# Altium PCB GeekTrack_PCB.pcbdoc
Units mil, origin at the board's own origin, x right, y up, seen from the top; angles counter-clockwise.
Board outline 3959.43 x 2614.84 mil, 4 copper layers (Top Layer, Mid-Layer 1, Mid-Layer 2, Bottom Layer); 61 components, 43 nets, 274 pads, 178 vias.
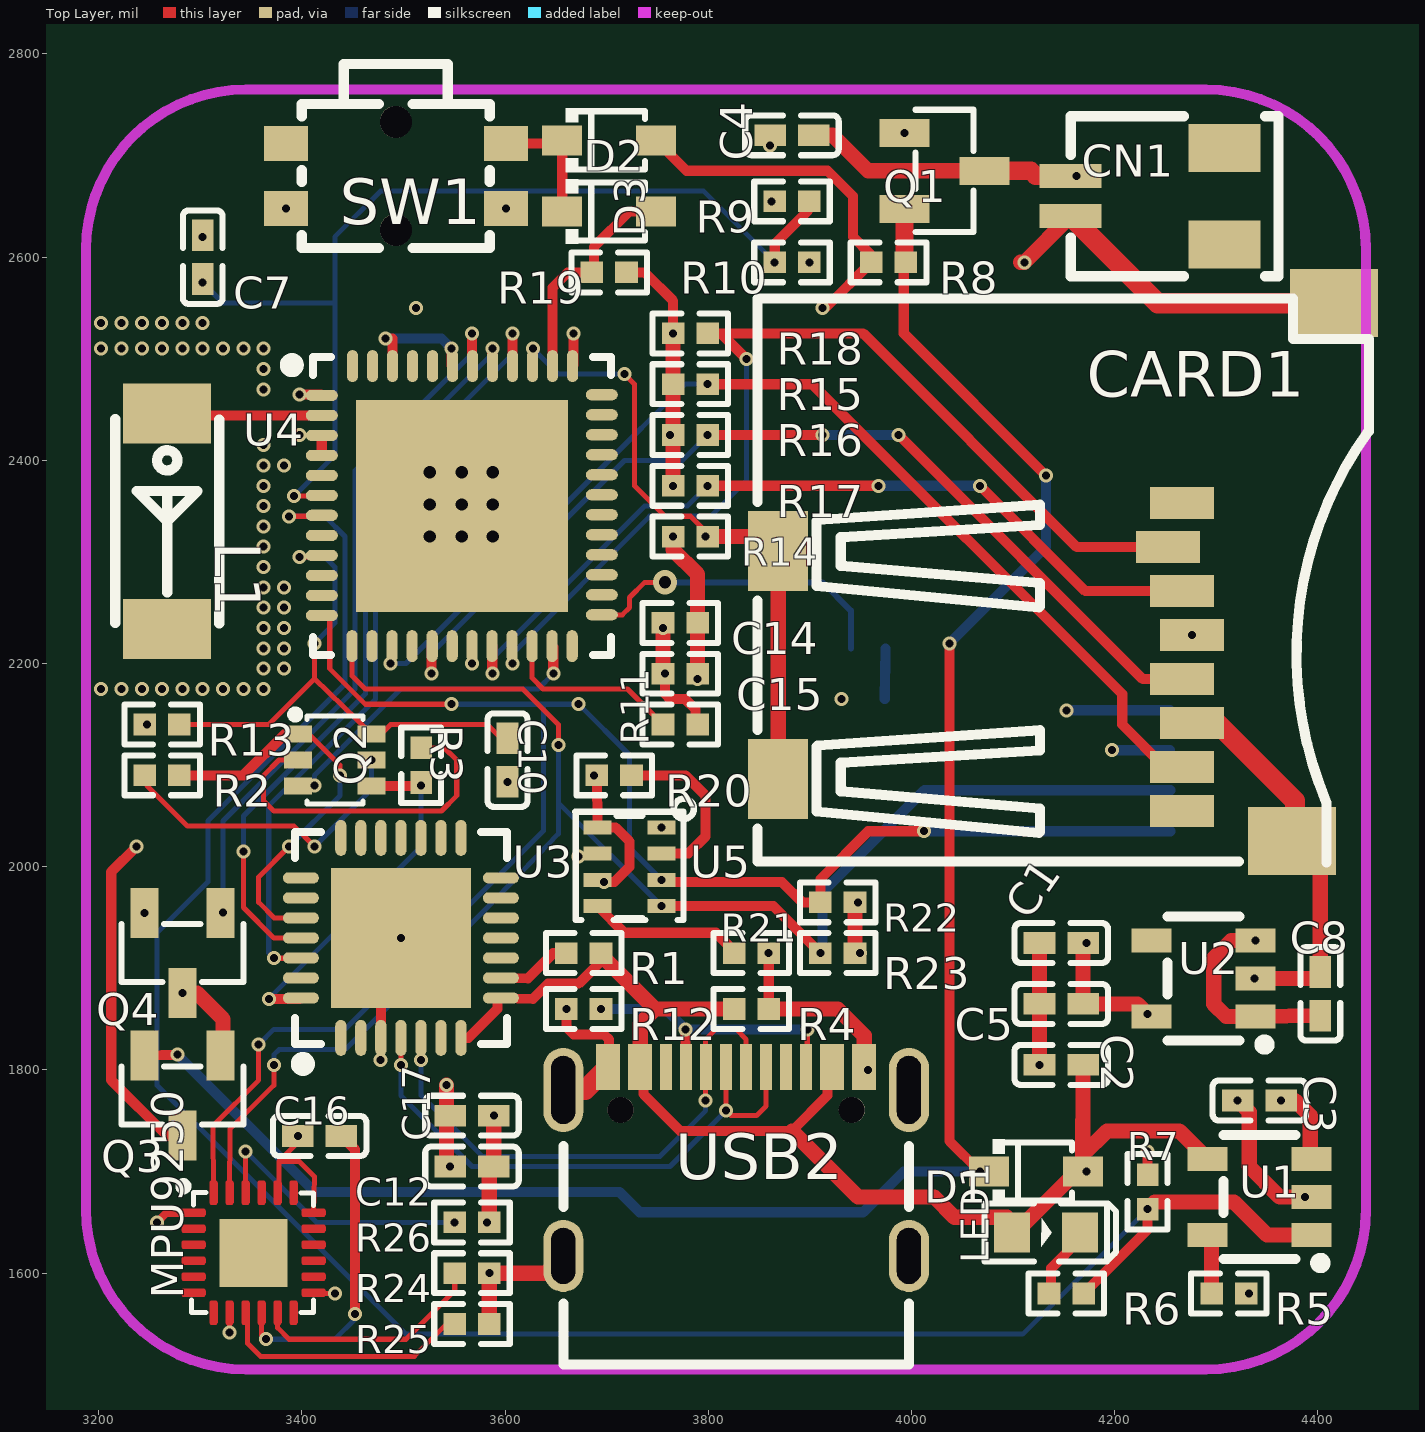
[diagram p0: Top Layer view]
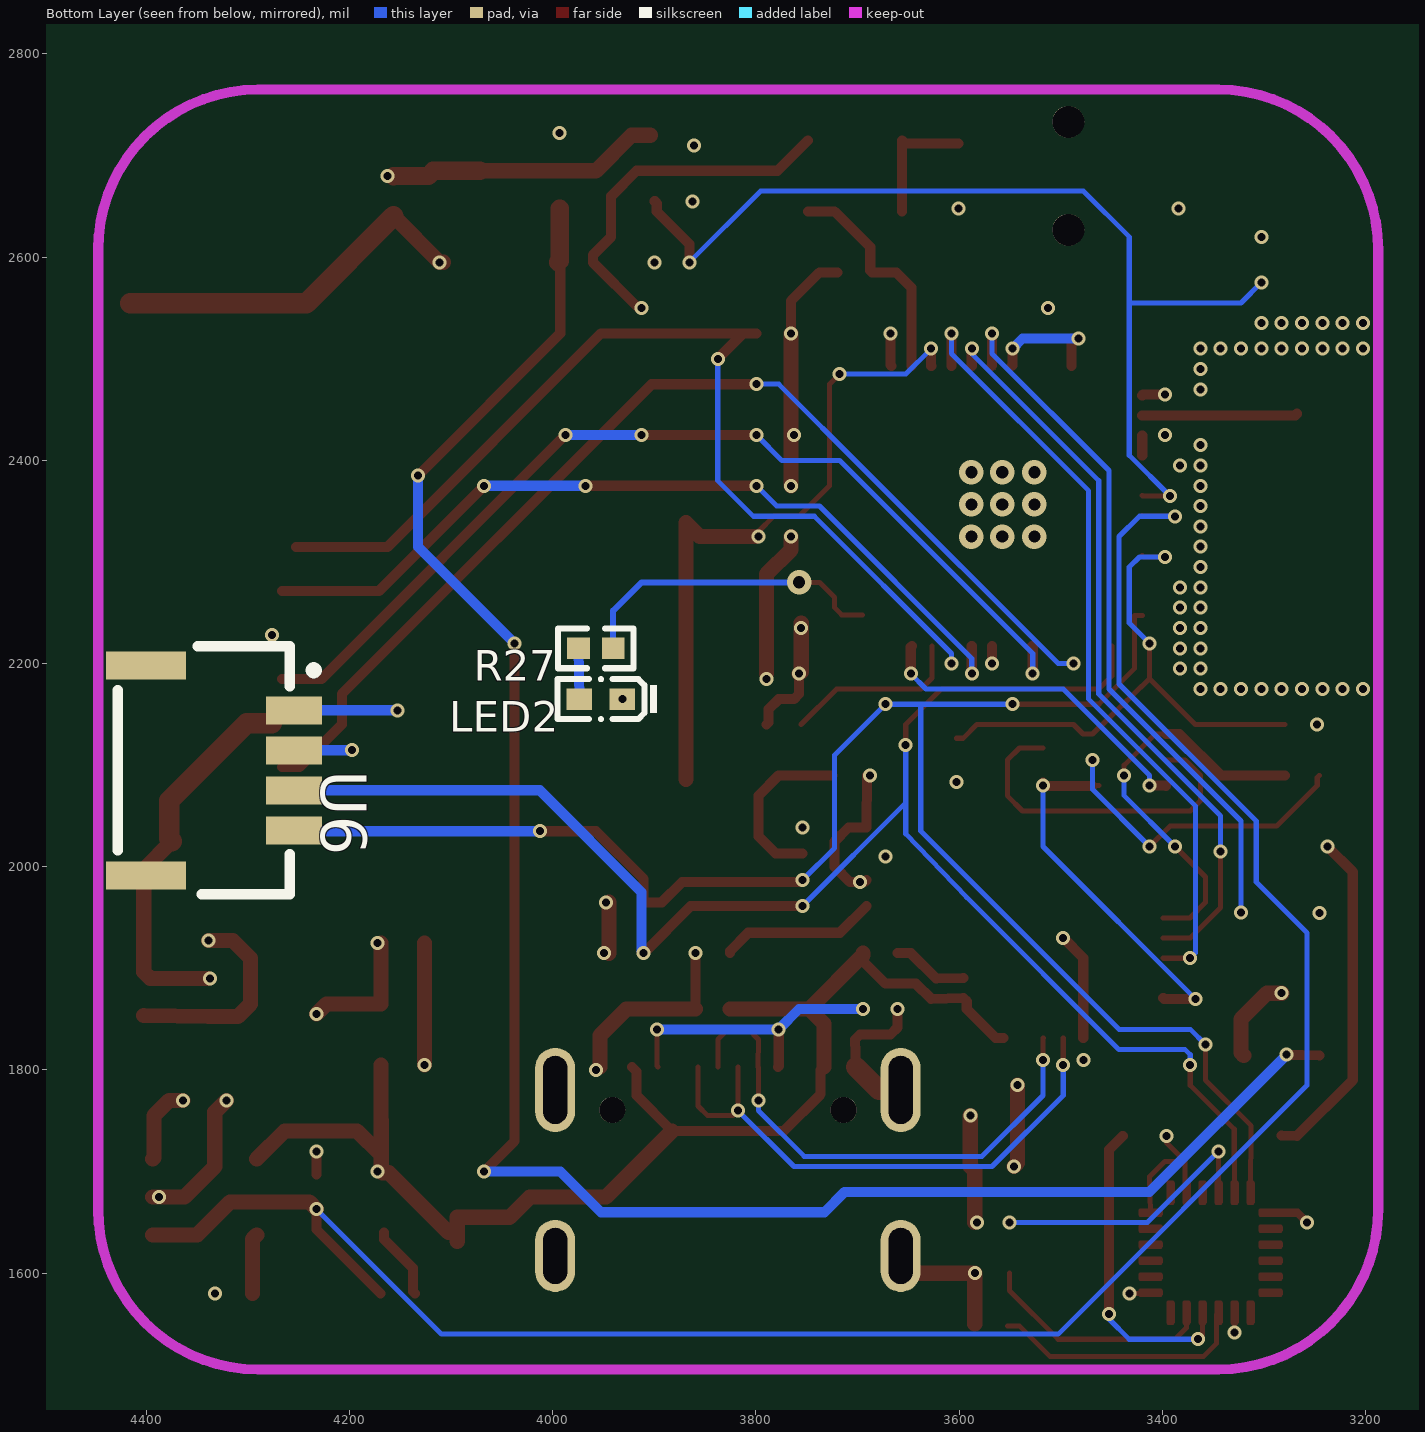
[diagram p1: Bottom Layer view, seen from below]
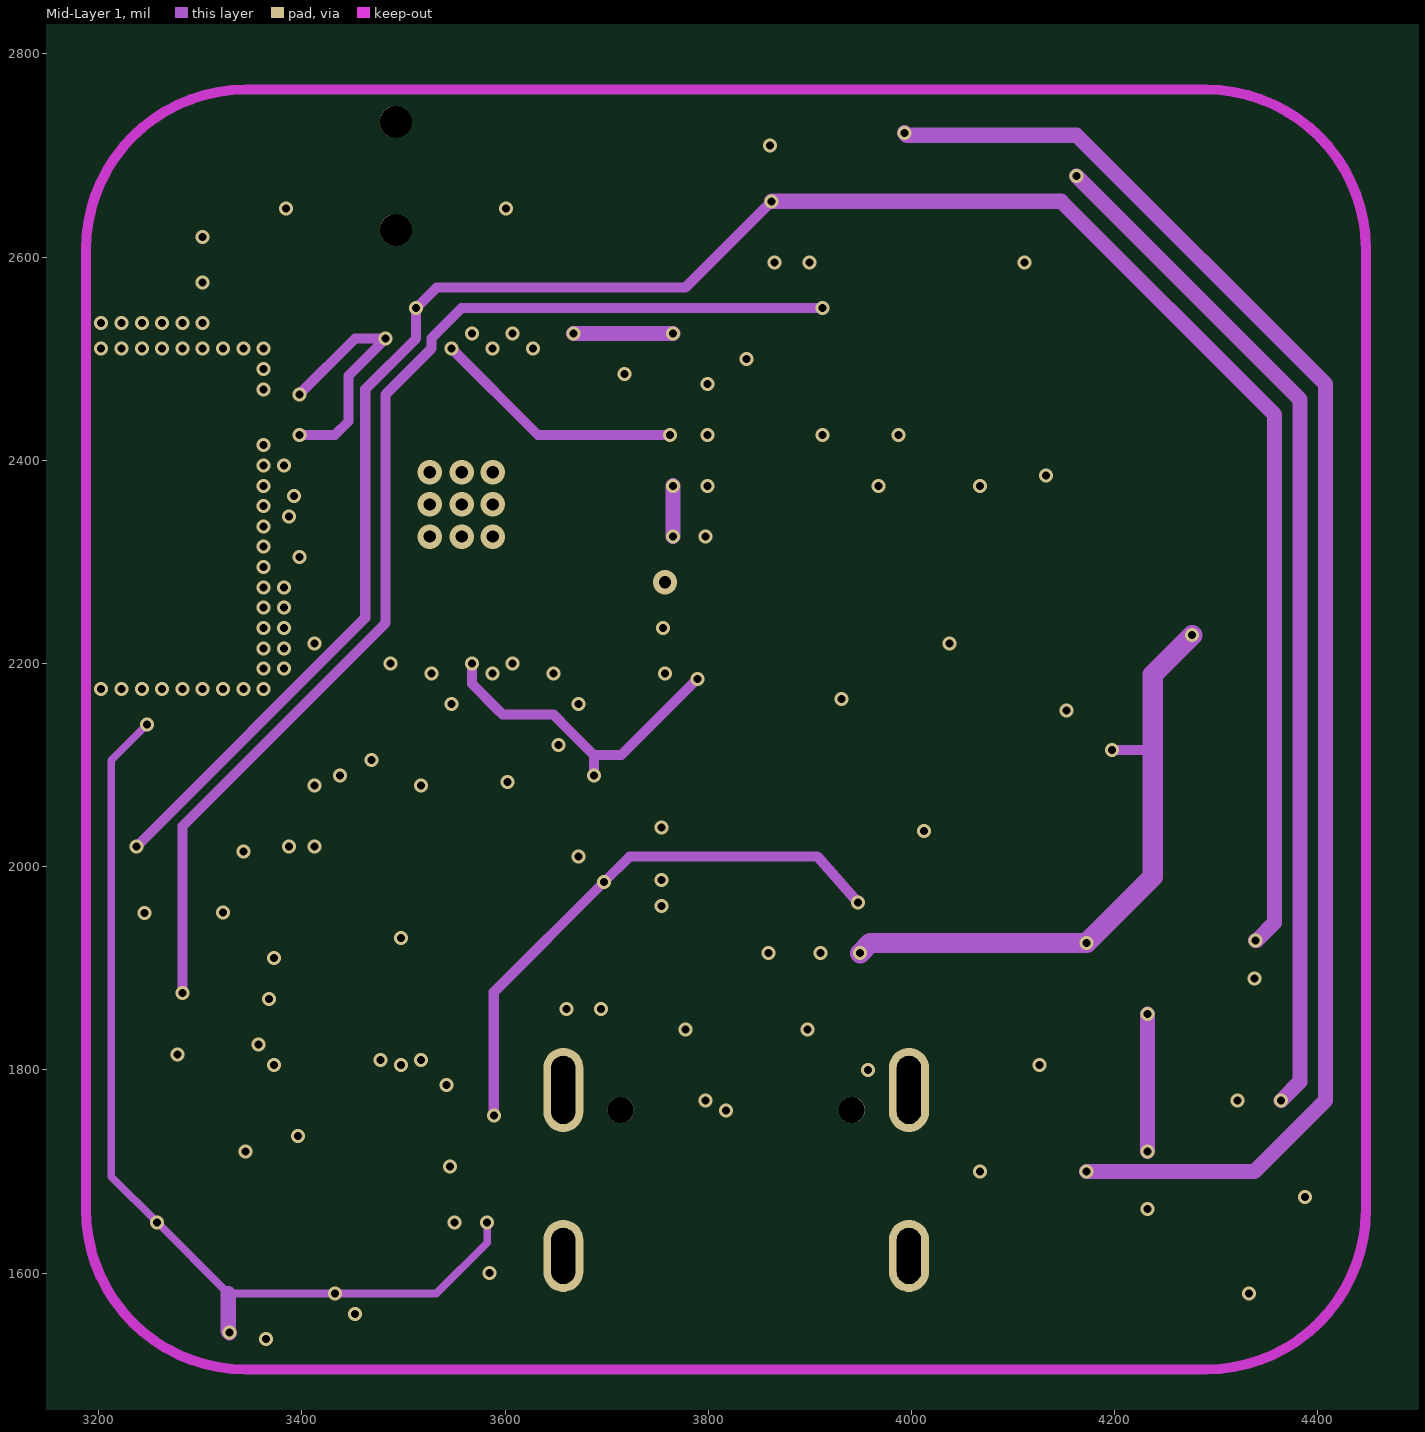
[diagram p2: Mid-Layer 1]
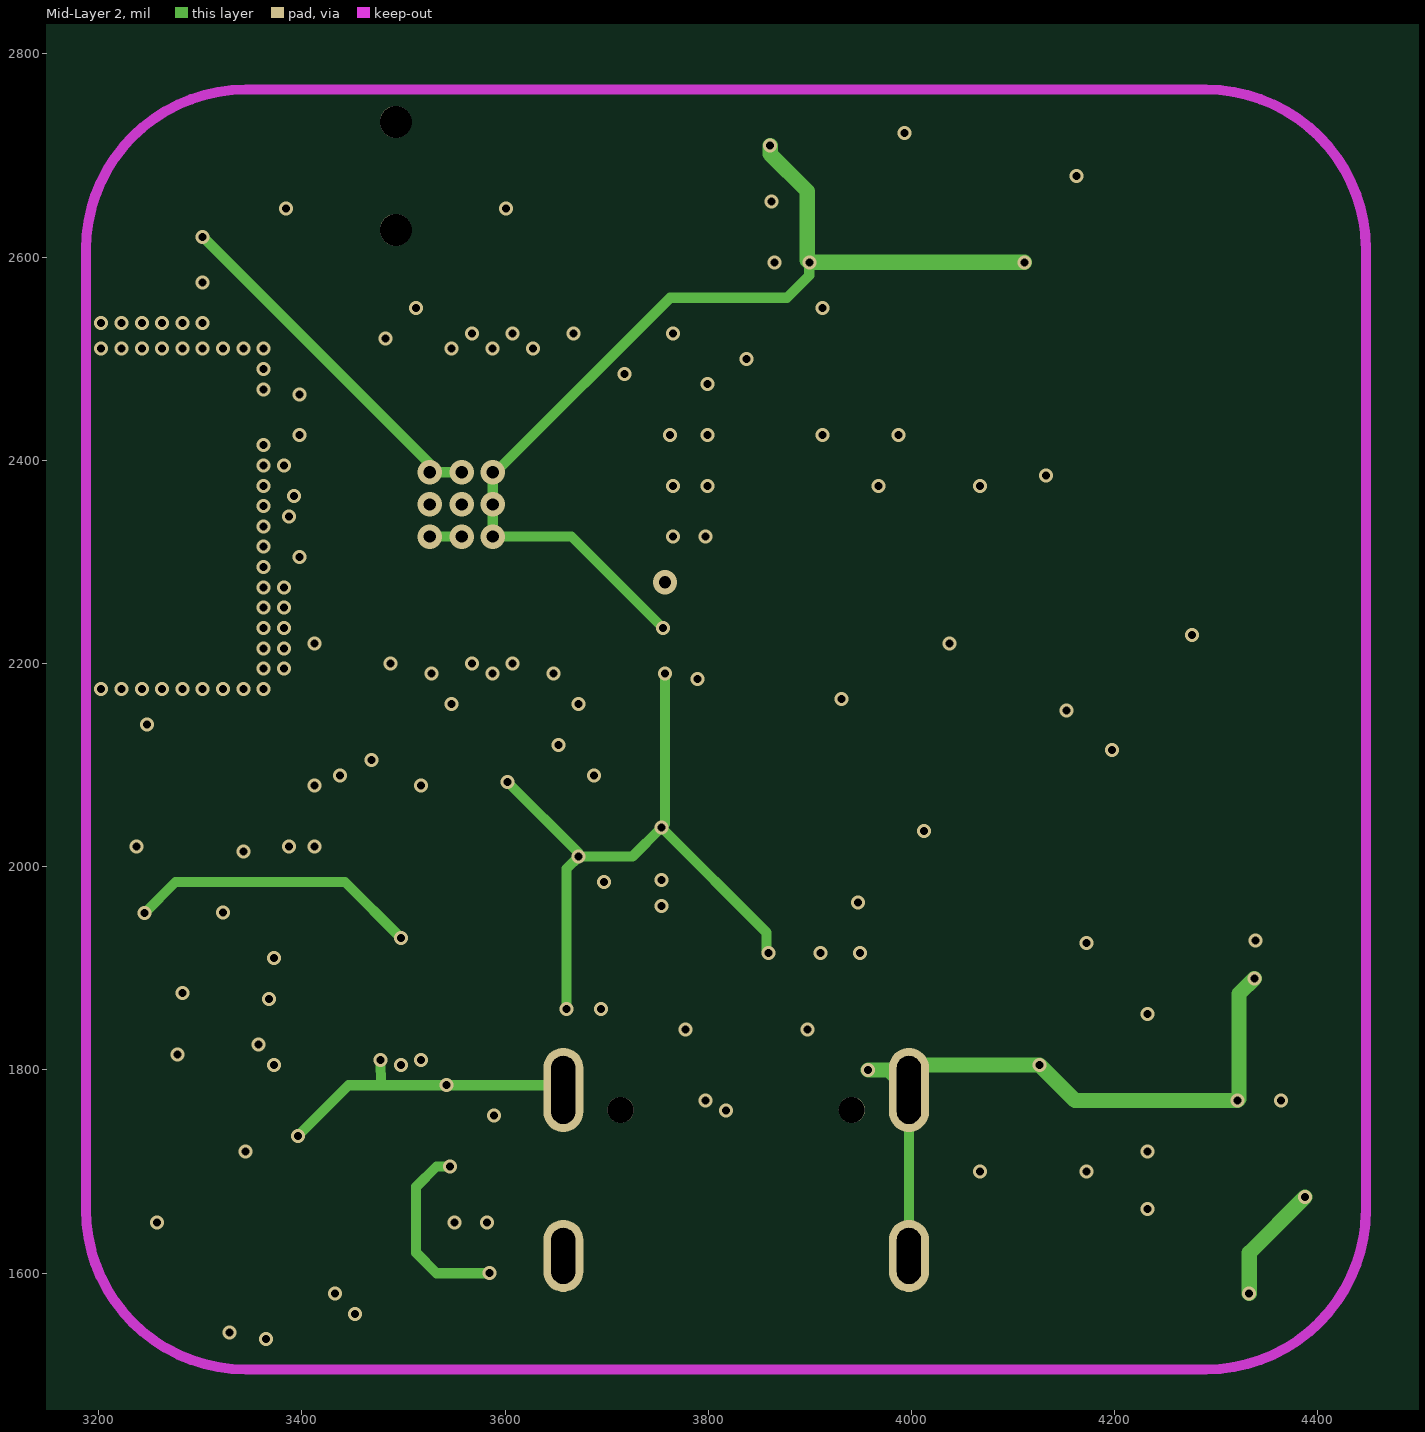
[diagram p3: Mid-Layer 2]

## Layer stack, top to bottom
Top Solder: solder mask 0.4, Solder Resist, Dk 3.5
Top Layer: signal copper 1.4
Dielectric1: dielectric 12.6, FR-4, Dk 4.8
Mid-Layer 1: signal copper 1.4
Dielectric3: dielectric 12.6, FR-4, Dk 4.8
Mid-Layer 2: signal copper 1.4
Dielectric2: dielectric 12.6, FR-4, Dk 4.8
Bottom Layer: signal copper 1.4
Bottom Solder: solder mask 0.4, Solder Resist, Dk 3.5

## Board outline
4959.43,1000 1000,1000 1000,3614.84 4959.43,3614.84

## Design rules (kind name [scope] priority, off if disabled: settings)
Clearance [All] p1: gap=10 ignorepadtopadclearanceinfootprint=FALSE except(0: Arc-Hole Track-Hole SMDPad-Hole THPad-Hole Via-Hole Fill-Hole Poly-Hole Region-Hole Text-Hole)
PolygonConnect [All] p1: connectstyle=Relief reliefconductorwidth=10 reliefentries=4 polygonreliefangle="90 Angle" airgapwidth=10
RoutingVias [All] p1: holewidth=28 width=50 viastyle="Through Hole" minholewidth=28 minwidth=50 maxholewidth=28 maxwidth=50
SolderMaskExpansion [All] p1: expansion=4
Width [All] p1: maxlimit=10 minlimit=10 preferedwidth=10
30 further rules are at their usual default settings.

## Components (designator, comment, footprint, x,y, rotation, side; value= is the part's Value field where it differs from the comment)
C1 "100nF" C0402 4147.5,1924.84 r0 top
C2 "10uF" C0402 4147.5,1804.84 r0 top
C3 "100nF" C0402 4342.5,1769.84 r0 top
C4 "10uF" C0402 3882.5,2719.84 r0 top
C5 "10uF" C0402 4147.5,1864.84 r0 top
C7 "100nF" C0402 3302.5,2599.84 r90 top
C8 "1uF" C0402 4402.5,1874.84 r270 top
C10 "100nF" C0402 3602.5,2104.84 r90 top
C12 "104" C0402 3567.5,1704.84 r0 top
C14 "1u" R0402#1 3772.5,2239.84 r0 top
C15 "0.1u" R0402#1 3772.5,2189.84 r0 top
C16 "104" C0402 3417.5,1734.84 r0 top
C17 "103" C0402 3567.5,1754.84 r0 top
CARD1 "TF-001B" TF-SMD_TF-001B 4142.5,2289.84 r180 top
CN1 "A1002WR-S-2P" CONN-SMD_A1002WR-S-2P 4232.5,2659.84 r90 top
D1 "B5819WS_C122855" SOD-323_L1.8-W1.3-LS2.5-RD 4122.5,1699.84 r0 top
D2 "B5819WS_C122855" SOD-323_L1.8-W1.3-LS2.5-RD 3702.5,2714.84 r0 top
D3 "B5819WS_C122855" SOD-323_L1.8-W1.3-LS2.5-RD 3702.5,2644.84 r0 top
L1 "AN2051-245" ANT2051 3267.5,2339.84 r270 top
LED1 "LED-0603_R" LED0603_RED 4132.5,1639.84 r0 top
LED2 "LED-0402" LED0402-RD 3952.5,2164.84 r180 bottom
MPU9250 "MPU9250" MPU9250 3352.45,1619.87 r0 top
Q1 "AO3401A_C700954" SOT-23-3_L2.9-W1.3-P1.90-LS2.4-BR 4032.5,2684.84 r180 top
Q2 "LMBT3904DW1T1G" SOT-363_L2.0-W1.3-P0.65-LS2.1-TL 3432.5,2104.84 r0 top
Q3 "AO3401A_C700954" SOT-23-3_L2.9-W1.3-P1.90-LS2.4-BR 3282.5,1774.84 r90 top
Q4 "AO3400A_C700953" SOT-23-3_L2.9-W1.3-P1.90-LS2.4-BR 3282.5,1914.84 r90 top
R1 "10K" R0402#1 3677.5,1914.84 r180 top
R2 "12K" R0402#1 3262.5,2089.84 r0 top
R3 "12K" R0402#1 3517.5,2099.84 r90 top
R4 "100K" R0402#1 3842.5,1859.84 r180 top
R5 "2K" R0402#1 4312.5,1579.84 r0 top
R6 "5.1K" R0402#1 4152.5,1579.84 r0 top
R7 "10K" R0402#1 4232.5,1679.84 r90 top
R8 "100K" R0402#1 3977.5,2594.84 r180 top
R9 "100K" R0402#1 3882.5,2654.84 r0 top
R10 "100K" R0402#1 3882.5,2594.84 r0 top
R11 "5K" R0402#1 3772.5,2139.84 r180 top
R12 "1K" R0402#1 3677.5,1859.84 r180 top
R13 "10K" R0402#1 3262.5,2139.84 r180 top
R14 "10K" R0402#1 3782.5,2324.84 r0 top
R15 "10K" R0402#1 3782.5,2474.84 r0 top
R16 "10K" R0402#1 3782.5,2424.84 r0 top
R17 "10K" R0402#1 3782.5,2374.84 r0 top
R18 "10K" R0402#1 3782.5,2524.84 r0 top
R19 "10K" R0402#1 3702.5,2584.84 r0 top
R20 "10k" R0402#1 3707.5,2089.84 r180 top
R21 "10k" R0402#1 3842.5,1914.84 r180 top
R22 "10k" R0402#1 3927.5,1964.84 r0 top
R23 "10k" R0402#1 3927.5,1914.84 r0 top
R24 "10k" R0402#1 3567.5,1599.84 r0 top
R25 "10k" R0402#1 3567.5,1549.84 r180 top
R26 "10k" R0402#1 3567.5,1649.84 r0 top
R27 "5K" R0402#2 3957.5,2214.84 r180 bottom
SW1 "ST-1189E" SW-SMD_ST-1189E 3492.5,2679.84 r90 top
U1 "MCP73831" SOT-23-5_L3.0-W1.7-P0.95-LS2.8-BR 4342.5,1674.84 r0 top
U2 "LP5907QMFX-3.3Q1" SOT-23-5_L3.0-W1.7-P0.95-LS2.8-BR 4287.5,1889.84 r0 top
U3 "CP2102-GMR" QFN-28_L5.0-W5.0-P0.50-BL-EP 3497.5,1929.84 r0 top
U4 "ESP32-PICO-D4" QFN-48_7X7X05P 3557.5,2354.84 r0 top
U5 "BMP280" SENSOR-TH_BMP280-BL 3722.5,1999.84 r180 top
U6 "SH1.0X4" CONN-SMD_SH1.0X4 4327.5,2094.84 r90 bottom
USB2 "TYPE-C 16P(073)" USB-C-SMD_TYPE-C16PIN_C668624 3827.5,1709.84 r0 top

## Footprints (in the part's own frame and the unit in brackets; to place one, negate y for a bottom-side part, rotate by r counter-clockwise, add the part's x,y. Pads: shape width x height; smd on the part's side, far side on the other; paste and mask are expansions set on the pad)
ANT2051 [mm]
  rect 1.5x2.2 smd: 1(-2.69,0) 2(2.69,0)
  silkscreen extent -2.56,-1.3 2.55,1.3
C0402 [mm]
  rect 0.79x0.54 smd: 1(-0.545,0) 2(0.545,0)
  silkscreen extent -1.17,-0.5 1.17,0.5
CONN-SMD_A1002WR-S-2P [mm]
  rect 0.6x1.55 smd: 1(-0.498,1.924) 2(0.501,1.924)
  rect 1.2x1.8 smd: 3(1.201,-1.924) 4(-1.201,-1.924)
  silkscreen extent -2,-3.27 2,1.92
CONN-SMD_SH1.0X4 [mm]
  rect 0.7x1.4 smd: 1(1.5,-1.85) 2(0.5,-1.85) 3(-0.5,-1.85) 4(-1.5,-1.85)
  rect 0.7x2 smd: 5(2.625,1.85) 6(-2.625,1.85)
  silkscreen extent -3.1,-2.42 3.1,2.55
LED0402-RD [mm]
  rect 0.636x0.54 smd: 1(0.538,0) 2(-0.538,0)
  silkscreen extent -1.09,-0.54 1.39,0.54
LED0603_RED [mm]
  rect 0.9x1 smd: 1(-0.85,0) 2(0.85,0)
  silkscreen extent -1.54,-0.73 1.75,0.73
MPU9250 [mil]
  round 0 smd: 1(-59,39.5) 2(-59,23.75) 3(-59,8) 4(-59,-7.74) 5(-59,-23.49) 6(-59,-39.24) 7(-39.31,-58.93) 8(-23.57,-58.93) 9(-7.82,-58.93) 10(7.93,-58.93) 11(23.68,-58.93) 12(39.43,-58.93) 13(59.11,-39.24) 14(59.11,-23.49) 15(59.11,-7.74) 16(59.11,8) 17(59.11,23.75) 18(59.11,39.5) 19(39.43,59.18) 20(23.68,59.18) 21(7.93,59.18) 22(-7.82,59.18) 23(-23.57,59.18) 24(-39.31,59.18)
  rect 66.93x66.93 smd: 25(0,0)
  Top Layer region: -68.84,35.56 -69.6,35.71 -70.23,36.14 -70.66,36.78 -70.81,37.53 -70.81,41.47 -70.66,42.22 -70.23,42.86 -69.6,43.29 -68.84,43.44 -49.16,43.44 -48.4,43.29 -47.77,42.86 -47.34,42.22 -47.19,41.47 -47.19,37.53 -47.34,36.78 -47.77,36.14 -48.4,35.71 -49.16,35.56
  Top Layer region: -68.84,19.82 -69.6,19.96 -70.23,20.39 -70.66,21.03 -70.81,21.78 -70.81,25.72 -70.66,26.47 -70.23,27.11 -69.6,27.54 -68.84,27.69 -49.16,27.69 -48.4,27.54 -47.77,27.11 -47.34,26.47 -47.19,25.72 -47.19,21.78 -47.34,21.03 -47.77,20.39 -48.4,19.96 -49.16,19.82
  Top Layer region: -68.84,4.07 -69.6,4.22 -70.23,4.64 -70.66,5.28 -70.81,6.04 -70.81,9.97 -70.66,10.73 -70.23,11.36 -69.6,11.79 -68.84,11.94 -49.16,11.94 -48.4,11.79 -47.77,11.36 -47.34,10.73 -47.19,9.97 -47.19,6.04 -47.34,5.28 -47.77,4.64 -48.4,4.22 -49.16,4.07
  Top Layer region: -68.84,-11.68 -69.6,-11.53 -70.23,-11.11 -70.66,-10.47 -70.81,-9.71 -70.81,-5.78 -70.66,-5.02 -70.23,-4.38 -69.6,-3.96 -68.84,-3.81 -49.16,-3.81 -48.4,-3.96 -47.77,-4.38 -47.34,-5.02 -47.19,-5.78 -47.19,-9.71 -47.34,-10.47 -47.77,-11.11 -48.4,-11.53 -49.16,-11.68
  Top Layer region: -68.84,-27.43 -69.6,-27.28 -70.23,-26.85 -70.66,-26.21 -70.81,-25.46 -70.81,-21.52 -70.66,-20.77 -70.23,-20.13 -69.6,-19.7 -68.84,-19.56 -49.16,-19.56 -48.4,-19.7 -47.77,-20.13 -47.34,-20.77 -47.19,-21.52 -47.19,-25.46 -47.34,-26.21 -47.77,-26.85 -48.4,-27.28 -49.16,-27.43
  Top Layer region: -68.84,-43.18 -69.6,-43.03 -70.23,-42.6 -70.66,-41.96 -70.81,-41.21 -70.81,-37.27 -70.66,-36.52 -70.23,-35.88 -69.6,-35.45 -68.84,-35.3 -49.16,-35.3 -48.4,-35.45 -47.77,-35.88 -47.34,-36.52 -47.19,-37.27 -47.19,-41.21 -47.34,-41.96 -47.77,-42.6 -48.4,-43.03 -49.16,-43.18
  Top Layer region: -43.25,-49.08 -43.1,-48.33 -42.67,-47.69 -42.04,-47.26 -41.28,-47.11 -37.35,-47.11 -36.59,-47.26 -35.95,-47.69 -35.53,-48.33 -35.38,-49.08 -35.38,-68.77 -35.53,-69.52 -35.95,-70.16 -36.59,-70.59 -37.35,-70.74 -41.28,-70.74 -42.04,-70.59 -42.67,-70.16 -43.1,-69.52 -43.25,-68.77
  Top Layer region: -27.5,-49.08 -27.35,-48.33 -26.93,-47.69 -26.29,-47.26 -25.53,-47.11 -21.6,-47.11 -20.84,-47.26 -20.21,-47.69 -19.78,-48.33 -19.63,-49.08 -19.63,-68.77 -19.78,-69.52 -20.21,-70.16 -20.84,-70.59 -21.6,-70.74 -25.53,-70.74 -26.29,-70.59 -26.93,-70.16 -27.35,-69.52 -27.5,-68.77
  Top Layer region: -11.76,-49.08 -11.61,-48.33 -11.18,-47.69 -10.54,-47.26 -9.79,-47.11 -5.85,-47.11 -5.1,-47.26 -4.46,-47.69 -4.03,-48.33 -3.88,-49.08 -3.88,-68.77 -4.03,-69.52 -4.46,-70.16 -5.1,-70.59 -5.85,-70.74 -9.79,-70.74 -10.54,-70.59 -11.18,-70.16 -11.61,-69.52 -11.76,-68.77
  Top Layer region: 3.99,-49.08 4.14,-48.33 4.57,-47.69 5.21,-47.26 5.96,-47.11 9.9,-47.11 10.65,-47.26 11.29,-47.69 11.72,-48.33 11.87,-49.08 11.87,-68.77 11.72,-69.52 11.29,-70.16 10.65,-70.59 9.9,-70.74 5.96,-70.74 5.21,-70.59 4.57,-70.16 4.14,-69.52 3.99,-68.77
  Top Layer region: 19.74,-49.08 19.89,-48.33 20.32,-47.69 20.95,-47.26 21.71,-47.11 25.65,-47.11 26.4,-47.26 27.04,-47.69 27.46,-48.33 27.61,-49.08 27.61,-68.77 27.46,-69.52 27.04,-70.16 26.4,-70.59 25.65,-70.74 21.71,-70.74 20.95,-70.59 20.32,-70.16 19.89,-69.52 19.74,-68.77
  Top Layer region: 35.49,-49.08 35.64,-48.33 36.07,-47.69 36.7,-47.26 37.46,-47.11 41.39,-47.11 42.15,-47.26 42.79,-47.69 43.21,-48.33 43.36,-49.08 43.36,-68.77 43.21,-69.52 42.79,-70.16 42.15,-70.59 41.39,-70.74 37.46,-70.74 36.7,-70.59 36.07,-70.16 35.64,-69.52 35.49,-68.77
  Top Layer region: 49.27,-43.18 48.51,-43.03 47.88,-42.6 47.45,-41.96 47.3,-41.21 47.3,-37.27 47.45,-36.52 47.88,-35.88 48.51,-35.45 49.27,-35.3 68.95,-35.3 69.71,-35.45 70.35,-35.88 70.77,-36.52 70.92,-37.27 70.92,-41.21 70.77,-41.96 70.35,-42.6 69.71,-43.03 68.95,-43.18
  Top Layer region: 49.27,-27.43 48.51,-27.28 47.88,-26.85 47.45,-26.21 47.3,-25.46 47.3,-21.52 47.45,-20.77 47.88,-20.13 48.51,-19.7 49.27,-19.56 68.95,-19.56 69.71,-19.7 70.35,-20.13 70.77,-20.77 70.92,-21.52 70.92,-25.46 70.77,-26.21 70.35,-26.85 69.71,-27.28 68.95,-27.43
  Top Layer region: 49.27,-11.68 48.51,-11.53 47.88,-11.11 47.45,-10.47 47.3,-9.71 47.3,-5.78 47.45,-5.02 47.88,-4.38 48.51,-3.96 49.27,-3.81 68.95,-3.81 69.71,-3.96 70.35,-4.38 70.77,-5.02 70.92,-5.78 70.92,-9.71 70.77,-10.47 70.35,-11.11 69.71,-11.53 68.95,-11.68
  Top Layer region: 49.27,4.07 48.51,4.22 47.88,4.64 47.45,5.28 47.3,6.04 47.3,9.97 47.45,10.73 47.88,11.36 48.51,11.79 49.27,11.94 68.95,11.94 69.71,11.79 70.35,11.36 70.77,10.73 70.92,9.97 70.92,6.04 70.77,5.28 70.35,4.64 69.71,4.22 68.95,4.07
  Top Layer region: 49.27,19.82 48.51,19.96 47.88,20.39 47.45,21.03 47.3,21.78 47.3,25.72 47.45,26.47 47.88,27.11 48.51,27.54 49.27,27.69 68.95,27.69 69.71,27.54 70.35,27.11 70.77,26.47 70.92,25.72 70.92,21.78 70.77,21.03 70.35,20.39 69.71,19.96 68.95,19.82
  Top Layer region: 49.27,35.56 48.51,35.71 47.88,36.14 47.45,36.78 47.3,37.53 47.3,41.47 47.45,42.22 47.88,42.86 48.51,43.29 49.27,43.44 68.95,43.44 69.71,43.29 70.35,42.86 70.77,42.22 70.92,41.47 70.92,37.53 70.77,36.78 70.35,36.14 69.71,35.71 68.95,35.56
  Top Layer region: 35.49,69.03 35.64,69.78 36.07,70.42 36.7,70.85 37.46,71 41.39,71 42.15,70.85 42.79,70.42 43.21,69.78 43.36,69.03 43.36,49.34 43.21,48.59 42.79,47.95 42.15,47.52 41.39,47.37 37.46,47.37 36.7,47.52 36.07,47.95 35.64,48.59 35.49,49.34
  Top Layer region: 19.74,69.03 19.89,69.78 20.32,70.42 20.95,70.85 21.71,71 25.65,71 26.4,70.85 27.04,70.42 27.46,69.78 27.61,69.03 27.61,49.34 27.46,48.59 27.04,47.95 26.4,47.52 25.65,47.37 21.71,47.37 20.95,47.52 20.32,47.95 19.89,48.59 19.74,49.34
  Top Layer region: 3.99,69.03 4.14,69.78 4.57,70.42 5.21,70.85 5.96,71 9.9,71 10.65,70.85 11.29,70.42 11.72,69.78 11.87,69.03 11.87,49.34 11.72,48.59 11.29,47.95 10.65,47.52 9.9,47.37 5.96,47.37 5.21,47.52 4.57,47.95 4.14,48.59 3.99,49.34
  Top Layer region: -11.76,69.03 -11.61,69.78 -11.18,70.42 -10.54,70.85 -9.79,71 -5.85,71 -5.1,70.85 -4.46,70.42 -4.03,69.78 -3.88,69.03 -3.88,49.34 -4.03,48.59 -4.46,47.95 -5.1,47.52 -5.85,47.37 -9.79,47.37 -10.54,47.52 -11.18,47.95 -11.61,48.59 -11.76,49.34
  Top Layer region: -27.5,69.03 -27.35,69.78 -26.93,70.42 -26.29,70.85 -25.53,71 -21.6,71 -20.84,70.85 -20.21,70.42 -19.78,69.78 -19.63,69.03 -19.63,49.34 -19.78,48.59 -20.21,47.95 -20.84,47.52 -21.6,47.37 -25.53,47.37 -26.29,47.52 -26.93,47.95 -27.35,48.59 -27.5,49.34
  Top Layer region: -43.25,69.03 -43.1,69.78 -42.67,70.42 -42.04,70.85 -41.28,71 -37.35,71 -36.59,70.85 -35.95,70.42 -35.53,69.78 -35.38,69.03 -35.38,49.34 -35.53,48.59 -35.95,47.95 -36.59,47.52 -37.35,47.37 -41.28,47.37 -42.04,47.52 -42.67,47.95 -43.1,48.59 -43.25,49.34
  silkscreen extent -73,-59 59,70
QFN-28_L5.0-W5.0-P0.50-BL-EP [mm]
  oval 0.28x0.9 smd: 1(-1.501,-2.5) 2(-1.001,-2.5) 3(-0.501,-2.5) 4(0,-2.5) 5(0.5,-2.5) 6(1.001,-2.5) 7(1.501,-2.5) 15(1.501,2.5) 16(1.001,2.5) 17(0.5,2.5) 18(0,2.5) 19(-0.501,2.5) 20(-1.001,2.5) 21(-1.501,2.5)
  oval 0.9x0.28 smd: 8(2.5,-1.501) 9(2.5,-1.001) 10(2.5,-0.5) 11(2.5,0) 12(2.5,0.5) 13(2.5,1.001) 14(2.5,1.501) 22(-2.5,1.501) 23(-2.5,1.001) 24(-2.5,0.5) 25(-2.5,0) 26(-2.5,-0.5) 27(-2.5,-1.001) 28(-2.5,-1.501)
  rect 3.5x3.5 smd: 29(0,0)
  silkscreen extent -2.65,-3.3 2.65,2.65
QFN-48_7X7X05P [mm]
  oval 0.8x0.28 smd: 1(-3.5,2.769) 2(-3.5,2.268) 3(-3.5,1.768) 4(-3.5,1.267) 5(-3.5,0.767) 6(-3.5,0.267) 7(-3.5,-0.231) 8(-3.5,-0.732) 9(-3.5,-1.232) 10(-3.5,-1.732) 11(-3.5,-2.233) 12(-3.5,-2.733) 25(3.5,-2.718) 26(3.5,-2.217) 27(3.5,-1.717) 28(3.5,-1.217) 29(3.5,-0.716) 30(3.5,-0.216) 31(3.5,0.282) 32(3.5,0.782) 33(3.5,1.283) 34(3.5,1.783) 35(3.5,2.283) 36(3.5,2.784)
  oval 0.28x0.8 smd: 13(-2.743,-3.5) 14(-2.243,-3.5) 15(-1.742,-3.5) 16(-1.242,-3.5) 17(-0.742,-3.5) 18(-0.241,-3.5) 19(0.257,-3.5) 20(0.757,-3.5) 21(1.257,-3.5) 22(1.758,-3.5) 23(2.258,-3.5) 24(2.758,-3.5) 37(2.769,3.5) 38(2.268,3.5) 39(1.768,3.5) 40(1.267,3.5) 41(0.767,3.5) 42(0.267,3.5) 43(-0.231,3.5) 44(-0.732,3.5) 45(-1.232,3.5) 46(-1.732,3.5) 47(-2.233,3.5) 48(-2.733,3.5)
  rect 5.3x5.3 smd: 49(0,0)
  silkscreen extent -4.4,-3.72 3.72,3.72
R0402#1 [mm]
  rect 0.566x0.54 smd: 1(-0.433,0) 2(0.433,0)
  silkscreen extent -0.94,-0.5 0.94,0.5
R0402#2 [mm]
  rect 0.566x0.54 smd: 1(0.433,0) 2(-0.433,0)
  silkscreen extent -0.94,-0.5 0.94,0.5
SENSOR-TH_BMP280-BL [mil]
  rect 27.56x13.8 smd: 1(-31.5,-38.6) 2(-31.5,-13) 3(-31.5,13) 4(-31.5,38.6) 5(31.5,38.6) 6(31.5,13) 7(31.5,-13) 8(31.5,-38.6)
  silkscreen extent -63,-67 54,52
SOD-323_L1.8-W1.3-LS2.5-RD [mm]
  rect 1x0.75 smd: 1(-1.173,0) 2(1.173,0)
  silkscreen extent -1.08,-0.8 0.9,0.8
SOT-23-3_L2.9-W1.3-P1.90-LS2.4-BR [mm]
  rect 1.25x0.7 smd: 1(1,-0.95) 2(1,0.95) 3(-1,0)
  silkscreen extent -0.73,-1.53 0.73,1.53
SOT-23-5_L3.0-W1.7-P0.95-LS2.8-BR [mm]
  rect 1x0.6 smd: 1(1.3,-0.95) 2(1.3,0) 3(1.3,0.95) 4(-1.3,0.95) 5(-1.3,-0.95)
  silkscreen extent -0.9,-1.78 1.65,1.55
SOT-363_L2.0-W1.3-P0.65-LS2.1-TL [mm]
  rect 0.7x0.42 smd: 1(-0.92,0.65) 2(-0.92,0) 3(-0.92,-0.65) 4(0.92,-0.65) 5(0.92,0) 6(0.92,0.65)
  silkscreen extent -1.09,-1.1 0.7,1.24
SW-SMD_ST-1189E [mm]
  rect 0.875x1.1 smd: 1(0.813,2.75) 2(0.813,-2.75) 3(-0.813,2.75) 4(-0.813,-2.75)
  round 0.8 hole 0.8 unplated: ""(-1.35,0) ""(1.35,0)
  silkscreen extent -1.8,-2.35 2.8,2.35
TF-SMD_TF-001B [mm]
  rect 1.6x0.8 smd: 1(-3.145,-1.726) 2(-2.8,-0.625) 3(-3.15,0.475) 4(-3.4,1.575) 5(-3.15,2.675) 6(-3.4,3.775) 7(-3.15,4.875) 8(-3.15,5.975)
  rect 2.2x1.7 smd: 9(-5.9,6.725) 10(-6.95,-6.725)
  rect 1.5x2 smd: 11(6.95,5.175) 12(6.95,-0.525)
  silkscreen extent -7.82,-6.84 7.47,7.26
USB-C-SMD_TYPE-C16PIN_C668624 [mm]
  oval 1x2.1 hole 0.6 slot 1.7 at 90 deg: 1(-4.32,1.787) 2(4.32,1.787)
  oval 1x1.8 hole 0.6 slot 1.4 at 90 deg: 3(-4.32,-2.362) 4(4.32,-2.362)
  rect 0.6x1.15 smd: A1B12(-3.2,2.362) A4B9(-2.4,2.362) B1A12(3.2,2.362) B4A9(2.4,2.362)
  rect 0.3x1.15 smd: A5(-1.25,2.362) A6(-0.25,2.362) A7(0.25,2.362) A8(1.25,2.362) B5(1.75,2.362) B6(0.75,2.362) B7(-0.75,2.362) B8(-1.75,2.362)
  round 0.65 hole 0.65 unplated: ""(-2.89,1.288) ""(2.89,1.288)
  silkscreen extent -4.32,-5.08 4.32,0.38

## Via types
v1: diameter 13.78, hole 7.87, Top Layer to Bottom Layer, tented both sides, 168 vias
v2: diameter 24, hole 12, Top Layer to Bottom Layer, tented both sides, 10 vias

## Nets (pads, with @x,y where several pads share a name; then routed paths per layer and width w, separated by ;. In a path a pad name is that pad's centre, name@x,y a point inside that pad or via, vN(x,y) a via of type N, cw(c..) or ccw(c..) an arc to the next point about the centre after c; other vN are vias at no path point)
BAT_DET: C7.1 R9.2 R10.1 U4.6 | length 995
  Top Layer w5: v1(3392.5,2364.84) 3419.21,2364.84 U4.6
  Top Layer w10: v1(3865.46,2594.84) 3865.5,2612.84 3897.5,2644.84 3897.5,2652.84 R9.2
  Bottom Layer w5: v1(3302.5,2574.84) 3322.5,2554.84 3432.5,2554.84 3432.5,2551.84 ; v1(3392.5,2364.84) 3432.5,2404.84 3432.5,2619.84 3477.5,2664.84 3795.5,2664.84 v1(3865.46,2594.84)
BOOT: Q2.3 U4.23 | length 330.5
  Top Layer w10: Q2.3 3396.87,2079.84 v1(3412.5,2079.84) ; U4.23 3647.5,2215.94 v1(3647.5,2189.84)
  Bottom Layer w5: v1(3412.5,2079.84) 3412.5,2089.84 3497.5,2174.84 3632.5,2174.84 v1(3647.5,2189.84)
CHG_DET: R6.2 R7.1 U1.1 U4.7 | length 2126.5
  Top Layer w5: v1(3387.5,2344.84) 3418.81,2344.84 U4.7
  Top Layer w10: R6.2 4232.5,1642.84 v1(4232.5,1662.8)
  Top Layer w15: v1(4232.5,1662.8) 4239.54,1669.84 4317.5,1669.84 4349.9,1637.44 U1.1
  Bottom Layer w5: v1(3387.5,2344.84) 3422.5,2344.84 3442.5,2324.84 3442.5,2179.84 3307.5,2044.84 3307.5,1984.84 3257.5,1934.84 3257.5,1784.84 3502.5,1539.84 4052.5,1539.84 4109.54,1539.84 v1(4232.5,1662.8)
CSB: R20.1 U5.2 | length 171.8
  Top Layer w10: R20.1 3777.5,2089.84 3797.5,2069.84 3797.5,2029.84 3780.5,2012.84 U5.2
D+: U3.4 USB2.A6 USB2.B6 | length 555.5
  Top Layer w5: v1(3497.5,1804.84) U3.4 ; USB2.A6 3817.5,1802.69 v1(3817.5,1759.84) 3822.5,1754.84 3847.5,1754.84 3857.03,1764.37 USB2.B6
  Bottom Layer w5: v1(3497.5,1804.84) 3497.5,1774.84 3567.5,1704.84 3762.5,1704.84 v1(3817.5,1759.84)
D-: U3.5 USB2.A7 USB2.B7 | length 525.6
  Top Layer w5: U3.5 3517.5,1831.11 v1(3517.5,1809.84) ; v1(3797.5,1769.84) 3797.5,1802.38 USB2.B7 ; USB2.B7 3797.5,1829.84 3807.5,1839.84 3827.5,1839.84 3837.3,1830.04 USB2.A7
  Bottom Layer w5: v1(3517.5,1809.84) 3517.5,1774.84 3577.5,1714.84 3752.5,1714.84 3797.5,1759.84 v1(3797.5,1769.84)
DTR: Q2.4 R3.1 U3.28 | length 360.8
  Top Layer w5: Q2.4@3462.5,2079.84 3468.13,2079.84 Q2.4
  Top Layer w10: v1(3367.5,1869.84) 3398.18,1869.84 U3.28 ; Q2.4 3513.95,2079.25 R3.1
  Bottom Layer w5: v1(3367.5,1869.84) 3517.5,2019.84 v1(3517.5,2079.84)
ESP_EN: C10.2 Q2.6 R13.1 U4.9 | length 553.4
  Top Layer w5: R13.1 3367.5,2139.84 3412.5,2184.84 ; v1(3397.5,2304.84) 3418.21,2304.84 U4.9 ; v1(3412.5,2219.84) 3412.5,2184.84 ; C10.2 3596,2126.34 3582.5,2139.84 3487.5,2139.84 3478.1,2130.44 Q2.6 3412.5,2184.84
  Bottom Layer w5: v1(3397.5,2304.84) 3422.5,2304.84 3432.5,2294.84 3432.5,2239.84 v1(3412.5,2219.84)
GND: C1.1 C2.1 C3.1 C4.1 C5.1 C7.2 C8.1 C10.1 C12.1 C14.1 C15.1 C16.1 C17.1 CARD1.6 CARD1.9 CARD1.10 CN1.1 LED2.1 MPU9250.18 MPU9250.20 Q4.2 R4.1 R5.2 R10.2 R11.1 R12.2 R21.1 R24.2 R25.1 SW1.4 U1.2 U2.2 U3.3 U3.29 U4.49 U5.1 U5.7 U6.1 USB2.1 USB2.2 USB2.3 USB2.4 USB2.A1B12 USB2.B1A12 | length 5733.8
  Top Layer w5: 3376.18,1679.02 3377.5,1680.33 3377.5,1709.84 ; v1(3396.04,1734.84) 3396.04,1728.38 3377.5,1709.84 ; 3411.6,1659.34 3412.5,1694.84 3397.5,1709.84 3377.5,1709.84
  Top Layer w10: U3.3 3477.8,1910.13 v1(3497.5,1929.84) ; v1(3660.5,1859.84) 3660.5,1841.84 3667.5,1834.84 3697.5,1834.84 3702.5,1829.84 USB2.A1B12 ; v1(3757.5,2189.84) 3757.5,2169.84 3762.5,2164.84 3777.5,2164.84 3787.5,2154.84 3787.5,2141.88 R11.1 ; R4.1 v1(3859.54,1914.84)
  Top Layer w15: v1(3542.5,1784.84) 3542.5,1708.38 v1(3546.04,1704.84) ; R25.1 v1(3584.54,1599.84) 3640.43,1599.84 USB2.3 ; C14.1 3755.46,2191.88 v1(3757.5,2189.84) ; R4.1 3927.5,1859.84 3953.5,1833.84 USB2.B1A12 ; v1@4107.5,2594.84 v1(4111.36,2594.84) CN1.1 ; v1(4126.04,1804.84) C5.1 C1.1 ; v1(4321.04,1769.84) 4332.5,1758.38 4332.5,1704.84 4362.5,1674.84 U1.2 ; U2.2 4396.04,1889.84 C8.1 4402.5,1997.36 CARD1.9
  Top Layer w20: USB2.1 3678.87,1780.21 USB2.A1B12 ; CN1.1 4242.3,2554.64 CARD1.10 ; CARD1.6 4301.1,2141.24 4377.5,2064.84 4377.5,2027.84 CARD1.9@4374.8,2025.04
  Mid-Layer 2 w10: v1(3245.1,1954.21) 3275.7,1984.84 3442.5,1984.84 v1(3497.5,1929.84) ; v1(3302.5,2619.84) 3525.9,2396.44 v2(3525.89,2388.1) ; v1(3396.04,1734.84) 3446.04,1784.84 v1(3542.5,1784.84) 3557.5,1784.84 3652.79,1784.84 USB2.1 ; v1(3477.5,1809.84) 3477.8,1784.84 ; v2(3525.89,2324.84) v2(3557.5,2324.84) ; v2(3525.89,2388.1) v2(3557.5,2388.1) ; v1(3546.04,1704.84) 3532.5,1704.84 3512.5,1684.84 3512.5,1619.84 3532.5,1599.84 v1(3584.54,1599.84) ; v2(3587.89,2388.1) v2(3587.89,2324.84) 3665.46,2324.84 v1(3755.46,2234.84) ; v2(3587.89,2388.1) 3589.6,2389.84 3592.5,2389.84 3762.5,2559.84 3877.5,2559.84 3899.5,2581.84 v1(3899.54,2594.84) ; v1@3602.5,2083.34 3672.5,2013.34 v1(3672.5,2009.84) ; v1(3660.5,1859.84) 3660.5,1997.84 v1(3672.5,2009.84) ; v1(3757.5,2189.84) 3757.5,2041.94 v1(3754,2038.44) ; v1(3859.54,1914.84) 3857.5,1916.84 3857.5,1934.94 v1(3754,2038.44) ; USB2.4 USB2.2 ; v1(3672.5,2009.84) 3725.4,2009.84 v1(3754,2038.44)
  Mid-Layer 2 w15: v1(3861.04,2709.84) 3861,2701.34 3897.5,2664.84 3897.5,2596.84 v1(3899.54,2594.84) 4111.3,2594.84 v1(4111.36,2594.84) ; v1(3957.5,1799.84) 3977.95,1799.84 USB2.2 ; 4052.5,1804.84 3997.6,1804.84 v1(4126.04,1804.84) 4161,1769.84 v1(4321.04,1769.84) ; v1(4321.04,1769.84) 4322.5,1771.3 4322.5,1874.84 v1(4337.5,1889.84) ; v1(4332.5,1579.84) 4332.5,1619.84 v1(4387.5,1674.84)
  Bottom Layer w10: v1(4152.5,2153.9) U6.1
  other v1: 3602.5,2083.38 3931.31,2164.84 3202.5,2174.84 3222.5,2174.84 3242.5,2174.84 3262.5,2174.84 3282.5,2174.84 3302.5,2174.84 3322.5,2174.84 3342.5,2174.84 3362.5,2174.84 3362.5,2194.84 3382.5,2194.84 3362.5,2214.84 3382.5,2214.84 3362.5,2234.84 3382.5,2234.84 3362.5,2254.84 3382.5,2254.84 3362.5,2274.84 3382.5,2274.84 3362.5,2294.84 3362.5,2314.84 3362.5,2334.84 3362.5,2354.84 3362.5,2374.84 3362.5,2394.84 3382.5,2394.84 3362.5,2414.84 3362.5,2469.84 3362.5,2489.84 3202.5,2509.84 3222.5,2509.84 3242.5,2509.84 3262.5,2509.84 3282.5,2509.84 3302.5,2509.84 3322.5,2509.84 3342.5,2509.84 3362.5,2509.84 3202.5,2534.84 3222.5,2534.84 3242.5,2534.84 3262.5,2534.84 3282.5,2534.84 3302.5,2534.84 3600.77,2647.83
  other v2: 3587.89,2356.5 3525.89,2356.51 3557.5,2356.51
LED1_2: LED1.2 R6.1 | length 72.6
  Top Layer w10: R6.1 4137.5,1581.88 4137.5,1604.84 4165.96,1633.3 LED1.2
LED_CTL: R27.1 U4.25 | length 312.9
  Top Layer w5: U4.25 3715.5,2247.84 3722.5,2254.84 3722.5,2264.84 3737.5,2279.84 v2(3757.5,2279.84)
  Bottom Layer w6: v2(3757.5,2279.84) 3912.5,2279.84 3940.46,2251.88 R27.1
MPU9250_9: MPU9250.9 R25.2 | length 251.8
  Top Layer w5: 3346.5,1559.14 3346.5,1530.84 3359.3,1518.04 3510.7,1518.04 3540.7,1548.04 R25.2@3552.3,1548.04
MPU9250_10: C16.2 MPU9250.10 | length 306.7
  Top Layer w5: MPU9250.10 3360.43,1539.07 v1(3364.67,1534.84)
  Top Layer w10: C16.2 3452.5,1721.3 v1(3452.5,1559.84)
  Bottom Layer w5: v1@3367.5,1534.84 3432.5,1534.84 3452.5,1554.84 v1(3452.5,1559.84)
MPU9250_11: MPU9250.11 R24.1 | length 230.7
  Top Layer w5: 3376.2,1560.94 3376.2,1546.14 3387.5,1534.84 3502.5,1534.84 3550.5,1582.84 R24.1
MPU9250_22: MPU9250.22 R26.1 | length 275.6
  Top Layer w5: 3344.68,1679.02 v1(3344.69,1719.84)
  Bottom Layer w5: v1(3344.69,1719.84) 3414.7,1649.84 v1(3550.46,1649.84)
MPU_SCL: MPU9250.23 R23.1 U4.13 U5.4 U6.3 | length 1651.6
  Top Layer w5: MPU9250.23 3329.2,1741.54 3372.5,1784.84 v1(3372.5,1804.84) ; U4.13 3449.5,2187.84 3462.5,2174.84 3617.5,2174.84 3652.5,2139.84 v1(3652.5,2119.84)
  Top Layer w10: v1(3754,1961.24) 3864.06,1961.24 v1(3910.46,1914.84)
  Bottom Layer w5: v1(3372.5,1804.84) 3372.5,1814.84 3377.5,1819.84 3442.5,1819.84 3592.5,1969.84 3652.5,2032.34 3652.5,2066.32 ; v1(3652.5,2119.84) 3652.5,2062.74 v1(3754,1961.24)
  Bottom Layer w10: v1(3910.46,1914.84) 3912.5,1916.84 3912.5,1974.84 4012.8,2075.14 U6.3@4254.7,2075.14
MPU_SDA: MPU9250.24 R22.1 U4.12 U5.3 U6.4 | length 1735.3
  Top Layer w5: 3313.2,1679.02 3312.5,1744.84 3357.5,1789.84 v1(3357.5,1824.84) ; U4.12 3427.5,2247.24 3427.5,2194.84 3462.5,2159.84 v1(3547.5,2159.84)
  Top Layer w10: v1(3754,1986.84) 3756,1984.84 3872.5,1984.84 3892.5,1964.84 R22.1 ; R22.1 3910.46,1987.8 3957.5,2034.84 v1(4012.5,2034.84)
  Bottom Layer w5: v1(3357.5,1824.84) 3372.5,1839.84 3442.5,1839.84 3637.7,2035.04 3637.7,2159.84 ; v1(3547.5,2159.84) v1(3672.5,2159.84) 3722.5,2109.84 3722.5,2018.34 v1(3754,1986.84)
  Bottom Layer w10: v1(4012.5,2034.84) U6.4@4254.7,2034.84
PWR_EN: Q4.1 U4.42 | length 703.9
  Top Layer w10: v1(3567.5,2524.84) 3567.5,2493.13 U4.42
  Bottom Layer w5: v1(3322.5,1954.84) 3322.5,2044.84 3452.5,2174.84 3452.5,2389.84 3567.5,2504.84 v1(3567.5,2524.84)
PWR_KEY: D3.2 R19.1 U4.38 | length 223.6
  Top Layer w10: U4.38 3646.8,2569.84 3661.8,2584.84 R19.1 3687.5,2586.88 3687.5,2609.84 3722.5,2644.84 D3.2
Q2_2: Q2.2 R3.2 | length 340.3
  Top Layer w5: Q2.2 3377.5,2104.84 3362.5,2089.84 3362.5,2064.84 3372.5,2054.84 3537.5,2054.84 3552.5,2069.84 3552.5,2104.84 3540.5,2116.84 R3.2@3517.5,2116.84
Q2_5: Q2.5 R2.1 | length 309
  Top Layer w5: R2.1 3247.5,2087.84 3247.5,2079.84 3287.5,2039.84 3392.5,2039.84 v1(3412.5,2019.84)
  Bottom Layer w5: v1(3412.5,2019.84) 3468.7,2076.04 v1(3468.72,2104.84)
R8_1: D1.1 Q1.2 Q3.2 R8.1 | length 1962
  Top Layer w10: Q3.2 v1(3277.5,1814.84) ; R8.1 3992.5,2592.84 3992.5,2524.84 v1(4132.5,2384.84) ; v1(4037.5,2219.84) 4037.5,1729.84 v1(4067.5,1699.84)
  Top Layer w18: Q1.2 3993.13,2596.25 R8.1
  Bottom Layer w10: v1(3277.5,1814.84) 3412.5,1679.84 3712.5,1679.84 3732.5,1659.84 3952.5,1659.84 3992.5,1699.84 v1(4067.5,1699.84) ; v1(4037.5,2219.84) 4132.5,2314.84 v1(4132.5,2384.84)
R8_2: D2.2 Q3.1 Q4.3 R8.2 | length 1586.3
  Top Layer w10: D2.2 3778.66,2684.84 3917.5,2684.84 3942.5,2659.84 3942.5,2619.84 3960.46,2601.88 R8.2 3915.46,2549.84 v1(3912.5,2549.84)
  Top Layer w15: v1(3282.5,1875.47) 3296.87,1875.47 3322.5,1849.84 3322.5,1816.81 Q3.1
  Mid-Layer 1 w10: v1@3282.5,1875.44 3282.5,2039.84 3482.5,2239.84 3482.5,2464.84 3527.5,2509.84 3527.5,2519.84 3557.5,2549.84 v1(3912.5,2549.84)
R21_2: R21.2 U5.5 | length 154.9
  Top Layer w10: U5.5 3717.5,1934.84 3807.5,1934.84 3825.5,1916.84 R21.2
R27_2: LED2.2 R27.2 | length 50
  Bottom Layer w10: LED2.2 R27.2
RTS: Q2.1 R2.2 U3.24 | length 403.6
  Top Layer w5: v1(3387.5,2019.84) 3357.5,1989.84 3357.5,1964.84 3372.8,1949.54 U3.24 ; Q2.1 3406.9,2130.44 3437.5,2099.84 v1@3437.5,2089.54
  Top Layer w10: R2.2 3342.5,2089.84 3383.1,2130.44 Q2.1
  Bottom Layer w5: v1(3387.5,2019.84) 3437.5,2069.84 v1@3437.5,2089.55
  other v1: 3437.5,2089.55
RXD: U3.25 U4.41 | length 737.8
  Top Layer w5: v1(3342.5,2014.84) 3342.5,1959.84 3372.5,1929.84 U3.25
  Top Layer w10: v1(3587.5,2509.84) 3587.5,2492.83 U4.41
  Bottom Layer w5: v1(3342.5,2014.84) 3342.5,2049.84 3462.5,2169.84 3462.5,2379.84 3587.5,2504.84 v1(3587.5,2509.84)
SD_CLK: CARD1.5 R16.2 U4.17 | length 975.1
  Top Layer w10: v1(3527.5,2189.84) 3527.5,2216.24 U4.17 ; v1(3799.54,2424.84) v1(3912.5,2424.84) ; v1(3987.5,2424.84) 4227.8,2184.54 CARD1.5
  Bottom Layer w5: v1(3527.5,2189.84) 3527.5,2209.84 3717.5,2399.84 3774.5,2399.84 v1(3799.54,2424.84)
  Bottom Layer w10: v1(3912.5,2424.84) v1(3987.5,2424.84)
SD_CS: CARD1.2 R18.2 U4.21 | length 1019.1
  Top Layer w10: R18.2 3952.5,2524.84 4162.9,2314.44 CARD1.2 ; R18.2 3812.5,2524.84 v1(3837.5,2499.84)
  Bottom Layer w5: v1(3607.5,2199.84) 3607.5,2209.84 3742.5,2344.84 3802.5,2344.84 3837.5,2379.84 v1(3837.5,2499.84)
SD_DET: CARD1.11 CARD1.12 R14.2 U4.39 | length 653.7
  Top Layer w5: v1(3717.5,2484.84) 3727.5,2474.84 3727.5,2374.84 3757.5,2344.84 3782.5,2344.84 3797.5,2329.84 3797.5,2326.84 R14.2
  Top Layer w10: U4.39 3627.5,2493.03 v1(3627.5,2509.84)
  Top Layer w15: R14.2 3855.26,2324.84 3868.88,2338.46 CARD1.12 CARD1.11
  Bottom Layer w5: v1(3627.5,2509.84) 3652.5,2484.84 v1(3717.5,2484.84)
  other v1: 3797.5,2324.84
SD_MISO: CARD1.7 R15.2 U4.15 | length 1066.6
  Top Layer w10: v1(3799.54,2474.84) 3902.5,2474.84 4207.5,2169.84 4207.5,2139.84 4249.4,2097.94 CARD1.7
  Bottom Layer w5: v1(3487.5,2199.84) 3502.5,2199.84 3692.5,2389.84 3777.5,2474.84 v1(3799.54,2474.84)
SD_MOSI: CARD1.3 R17.2 U4.20 | length 834.6
  Top Layer w10: U4.20 3587.5,2216.84 v1(3587.5,2189.84) ; v1(3799.54,2374.84) v1(3967.5,2374.84) ; v1(4067.5,2374.84) 4171.2,2271.14 CARD1.3
  Bottom Layer w5: v1(3587.5,2189.84) 3587.5,2204.84 3737.5,2354.84 3779.5,2354.84 v1(3799.54,2374.84)
  Bottom Layer w10: v1(3967.5,2374.84) v1(4067.5,2374.84)
SW1_2: D2.1 D3.1 SW1.2 | length 126.8
  Top Layer w10: SW1.2 3653.34,2711.85 D2.1 D3.1
TXD: U3.26 U4.40 | length 1439.8
  Top Layer w5: v1(3372.5,1909.84) 3398.78,1909.84 U3.26
  Top Layer w10: U4.40 3607.5,2492.73 v1(3607.5,2524.84)
  Bottom Layer w5: 3367.5,1959.84 3367.5,2059.84 ; v1(3372.5,1909.84) 3367.5,1914.84 3367.5,2059.84 ; 3367.5,2059.84 3472.5,2164.84 ; 3367.5,2059.84 3472.5,2164.84 ; 3472.5,2164.84 3472.5,2369.84 ; 3472.5,2164.84 3472.5,2369.84 ; 3472.5,2369.84 3607.5,2504.84 ; 3472.5,2369.84 3607.5,2504.84 ; 3607.5,2504.84 v1(3607.5,2524.84) 3607.5,2504.84
U1_5: R5.1 U1.5 | length 59.3
  Top Layer w15: U1.5 4295.46,1633.3 R5.1
U3_9: R1.2 U3.9 | length 75
  Top Layer w10: U3.9 3622.5,1889.84 3647.5,1914.84 R1.2
U4_2: L1.1 U4.2 | length 152.9
  Top Layer w10: L1.1@3267.5,2445.75 3269.11,2444.14 U4.2
U4_22: R11.2 U4.22 | length 179.2
  Top Layer w5: U4.22 3626.7,2185.64 3637.5,2174.84 3720.5,2174.84 R11.2
USB2_B5: R12.1 USB2.A5 USB2.B5 | length 286
  Top Layer w5: USB2.B5 3897.5,1803.95 v1(3897.5,1839.84)
  Top Layer w10: v1(3777.5,1839.84) 3777.5,1803.64 USB2.A5
  Bottom Layer w10: v1(3694.54,1859.84) 3757.5,1859.84 v1(3777.5,1839.84) v1(3897.5,1839.84)
VBAT: C3.2 C4.2 CN1.2 Q1.3 U1.3 | length 1355.9
  Top Layer w15: C4.2 3922.5,2719.84 3957.5,2684.84 Q1.3 ; v1(4363.96,1769.84) 4377.5,1769.84 4392.5,1754.84 4392.5,1713.42 U1.3
  Top Layer w18: Q1.3 4117.5,2684.84 4122.5,2679.84 CN1.2@4156.7,2679.54
  Mid-Layer 1 w15: v1(4162.5,2679.84) 4382.5,2459.84 4382.5,1788.34 v1(4363.96,1769.84)
VCC: C8.2 Q3.3 R9.1 U2.1 U2.3 | length 2682.1
  Top Layer w10: v1(3237.5,2019.84) 3212.5,1994.84 3212.5,1789.84 3267.5,1734.84 Q3.3@3282.5,1735.44
  Top Layer w15: v1(4338.68,1927.24) 4314.9,1927.24 4297.5,1909.84 4297.5,1864.84 4309.9,1852.44 U2.1 C8.2@4402.5,1853.34
  Mid-Layer 1 w10: v1(3237.5,2019.84) 3462.5,2244.84 3462.5,2469.84 3512.5,2519.84 v1(3512.5,2549.84) 3532.5,2569.84 3777.5,2569.84 v1(3862.5,2654.84)
  Mid-Layer 1 w15: v1(3862.5,2654.84) 4147.5,2654.84 4357.5,2444.84 4357.5,1944.84 4339.9,1927.24 v1(4338.68,1927.24)
VCC_3V3: C1.2 C5.2 C12.2 C14.2 C15.2 C17.2 CARD1.4 MPU9250.1 MPU9250.8 MPU9250.13 R7.2 R13.2 R14.1 R15.1 R16.1 R17.1 R18.1 R19.2 R20.2 R22.2 R23.2 R26.2 U2.5 U4.1 U4.3 U4.4 U4.19 U4.37 U4.43 U4.46 U5.6 U5.8 U6.2 | length 4434.7
  Top Layer w5: v1(3328.9,1541.24) MPU9250.8 ; MPU9250.13 3412.37,1579.84 v1(3432.5,1579.84)
  Top Layer w8: v1(3257.5,1649.84) 3267,1659.34 3293.5,1659.34
  Top Layer w10: v1(3397.5,2464.84) 3418.71,2464.84 U4.1 ; U4.4 U4.3 ; v1(3482.5,2519.84) 3489.3,2519.84 U4.46 ; v1(3547.5,2509.84) 3547.5,2493.53 U4.43 ; v1(3567.5,2199.84) 3567.5,2216.94 U4.19 ; U4.37 3667.5,2493.63 v1(3667.5,2524.84) ; R20.2 U5.8 3708.9,2038.44 3722.5,2024.84 3722.5,1999.84 3707.5,1984.84 v1(3697.5,1984.84) 3693,1984.84 U5.6 ; R19.2 3737.5,2584.84 3765.46,2556.88 v1(3765.46,2524.84) ; R7.2 v1(4232.5,1719.84)
  Top Layer w15: R26.2 3584.54,1700.42 C12.2 v1(3588.96,1754.84) ; v1(3765.46,2374.84) R16.1 R15.1 v1(3765.46,2524.84) ; v1(3765.46,2324.84) 3765.5,2311.84 3789.5,2287.84 C14.2 ; C15.2 C14.2 ; R23.2 R22.2 ; C1.2 C5.2 4222.5,1864.84 v1(4232.5,1854.84)
  Mid-Layer 1 w7.5: v1(3247.5,2139.84) 3212.5,2104.84 3212.5,1694.84 v1(3257.5,1649.84) 3327.5,1579.84 3532.5,1579.84 3582.5,1629.84 v1(3582.5,1649.84)
  Mid-Layer 1 w10: v1(3397.5,2424.84) 3432.5,2424.84 3445.9,2438.14 3445.9,2483.24 v1(3482.5,2519.84) 3452.5,2519.84 v1(3397.5,2464.84) ; v1(3547.5,2509.84) 3632.5,2424.84 v1(3762.5,2424.84) ; v1(3567.5,2199.84) 3567.5,2179.84 3592.5,2154.84 3597.5,2149.84 3627.5,2149.84 3647.5,2149.84 3662.5,2134.84 3687.5,2109.84 ; v1(3588.96,1754.84) 3589,1876.34 v1(3697.5,1984.84) 3722.5,2009.84 3907.5,2009.84 v1(3947.5,1964.84) ; v1(3687.5,2089.84) 3687.5,2109.84 ; v1(3789.54,2184.84) 3714.5,2109.84 3687.5,2109.84 ; v1(4197.5,2114.84) 4237.5,2114.84
  Mid-Layer 1 w15: 3327.5,1579.84 3327.5,1542.64 v1(3328.9,1541.24) ; v1(3667.5,2524.84) v1(3765.46,2524.84) ; v1(3765.46,2324.84) v1(3765.46,2374.84) ; v1(4232.5,1719.84) v1(4232.5,1854.84)
  Mid-Layer 1 w20: v1(3949.54,1914.84) 3959.5,1924.84 v1(4172.5,1924.84) 4237.5,1989.84 4237.5,2188.94 v1(4276.36,2227.83)
  Bottom Layer w10: v1(3482.5,2519.84) 3537.5,2519.84 v1(3547.5,2509.84) ; v1(4197.5,2114.84) 4197.5,2114.52 U6.2
VUSB: C2.2 D1.2 LED1.1 Q1.1 R1.1 R4.2 U1.4 U3.7 U3.8 USB2.A4B9 USB2.B4A9 | length 2784.3
  Top Layer w10: U3.7 3564.1,1831.44 3592.5,1859.84 3592.5,1867.34 U3.8 3627.5,1869.84 3642.5,1884.84 3672.5,1884.84 3694.5,1906.84 R1.1 ; USB2.A4B9 3736.3,1799.54 3736.3,1776.04 3772.5,1739.84 3882.5,1739.84 3917.5,1774.84 3917.5,1798.34 USB2.B4A9
  Top Layer w15: R1.1 3694.5,1912.84 3747.5,1859.84 ; USB2.A4B9 3733.01,1845.35 3747.5,1859.84 ; R4.2 3747.5,1859.84 ; 3882.5,1739.84 3947.5,1674.84 4022.5,1674.84 4042.5,1654.84 4094,1654.84 LED1.1@4094,1631.34 ; LED1.1 4102.5,1639.84 4161.3,1698.64 4167.5,1698.64 D1.2 C2.2 ; D1.2 4168.66,1716.01 4192.5,1739.84 4263.72,1739.84 U1.4
  Mid-Layer 1 w15: v1(3993.13,2722.24) 3995.5,2719.84 4162.5,2719.84 4407.5,2474.84 4407.5,1769.84 4337.5,1699.84 v1(4172.5,1699.84)
pads on no net: CARD1.1 CARD1.8 CN1.3 CN1.4 L1.2 MPU9250.2 MPU9250.3 MPU9250.4 MPU9250.5 MPU9250.6 MPU9250.7 MPU9250.12 MPU9250.14 MPU9250.15 MPU9250.16 MPU9250.17 MPU9250.19 MPU9250.21 MPU9250.25 SW1. SW1.1 SW1.3 U2.4 U3.1 U3.2 U3.6 U3.10 U3.11 U3.12 U3.13 U3.14 U3.15 U3.16 U3.17 U3.18 U3.19 U3.20 U3.21 U3.22 U3.23 U3.27 U4.5 U4.8 U4.10 U4.11 U4.14 U4.16 U4.18 U4.24 U4.26 U4.27 U4.28 U4.29 U4.30 U4.31 U4.32 U4.33 U4.34 U4.35 U4.36 U4.44 U4.45 U4.47 U4.48 U6.5 U6.6 USB2. USB2.A8 USB2.B8
copper on no net:
  other v1: 3384.23,2647.83

## Polygon pours and split planes (outlines as drawn)
GND on Bottom Layer "Bottom Layer-GND" (solid, pour order 0): 1610,2684.84 1765,2684.84 1765,2364.84 1570,2364.84 1525,2364.84 1525,2094.84 1525,1954.84 1525,1929.84 1865,1929.84 1865,1649.84 2160,1649.84 2935,1649.84 2935,2029.84 2935,2424.84 2935,2804.84 2935,3049.84 2620,3049.84 2300,3049.84 1920,3049.84 1540,3049.84 1540,2684.84
GND on Mid-Layer 2 "Mid-Layer 2-GND" (solid, pour order 2): 1605,2684.84 1765,2684.84 1765,2364.84 1570,2364.84 1575,2359.84 1575,1929.84 1870,1929.84 1865,1924.84 1865,1664.84 1870,1669.84 2860,1669.84 2900,1669.84 2905,1674.84 2905,3004.84 1575,3004.84 1575,2684.84
GND on Mid-Layer 1 "Mid-Layer 1-GND" (solid, pour order 4): 1500,2684.84 1765,2684.84 1765,2364.84 1500,2364.84 1500,2079.84 1500,1929.84 1870,1929.84 1865,1924.84 1865,1619.84 2990,1619.84 2990,1679.84 2990,2204.84 2990,3114.84 2985,3109.84 1500,3109.84 1500,2684.84
GND on Top Layer "Top Layer-GND" (solid, pour order 6): 1605,2684.84 1765,2684.84 1765,2364.84 1605,2364.84 1605,1929.84 1870,1929.84 1870,1694.84 2855,1694.84 2860,1699.84 2860,2954.84 2540,2954.84 1605,2954.84

## Keep-outs
Keep-Out Layer:
  lines w10: 3187.5,1662.48 ccw(c3344.98,1662.48) 3344.98,1505 ; 3187.5,2607.36 cw(c3344.98,2607.36) 3344.98,2764.84 ; 4289.86,1505 ccw(c4289.86,1662.48) 4447.34,1662.48 ; 4289.86,2764.84 cw(c4289.86,2607.36) 4447.34,2607.36